# Altium PCB wchlink.PcbDoc
Units mil, origin at the board's own origin, x right, y up, seen from the top; angles counter-clockwise.
Board outline 1929.18 x 748.11 mil, 2 copper layers (Top Layer, Bottom Layer); 27 components, 25 nets, 99 pads, 71 vias.
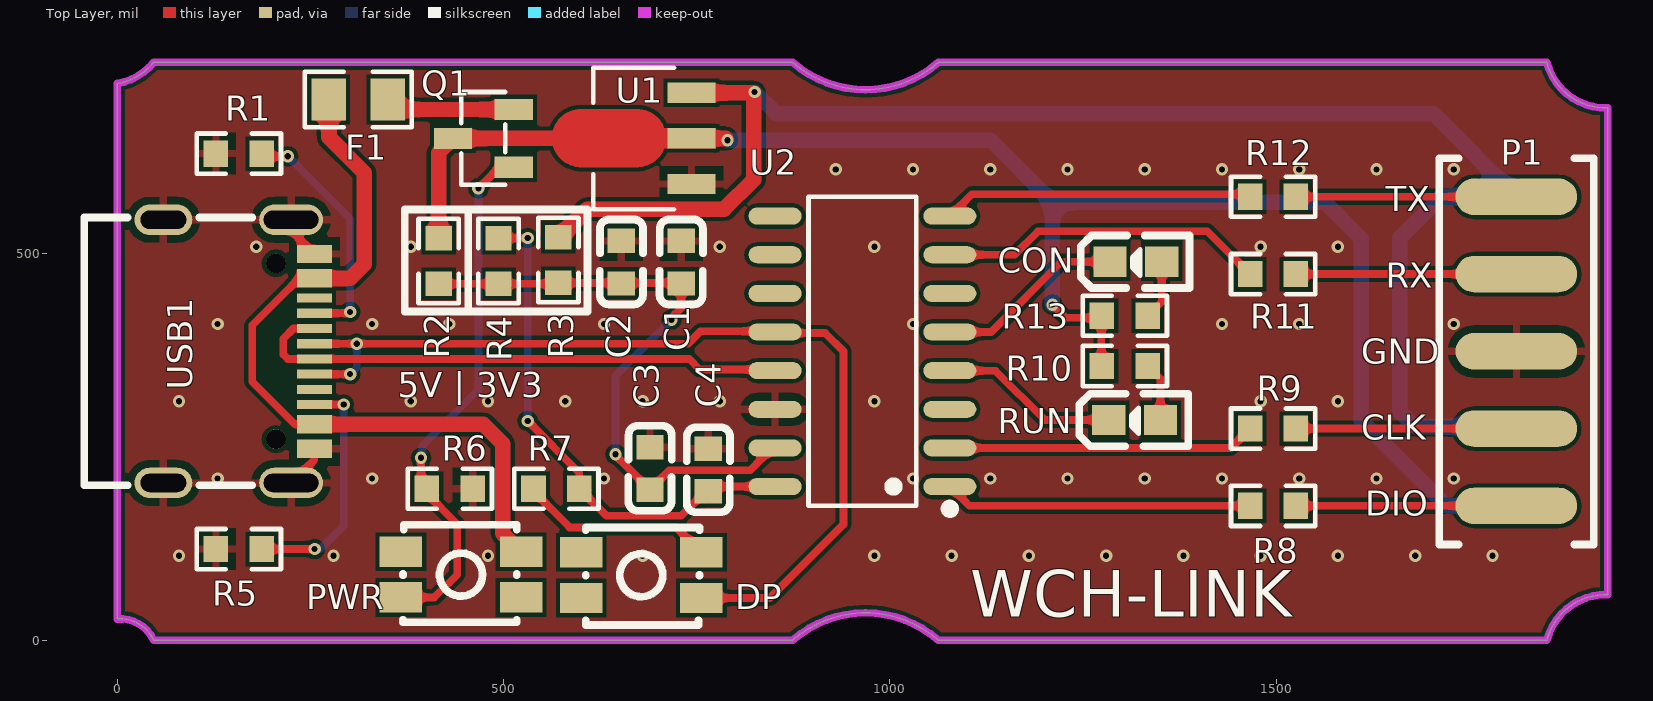
[diagram p0: Top Layer view]
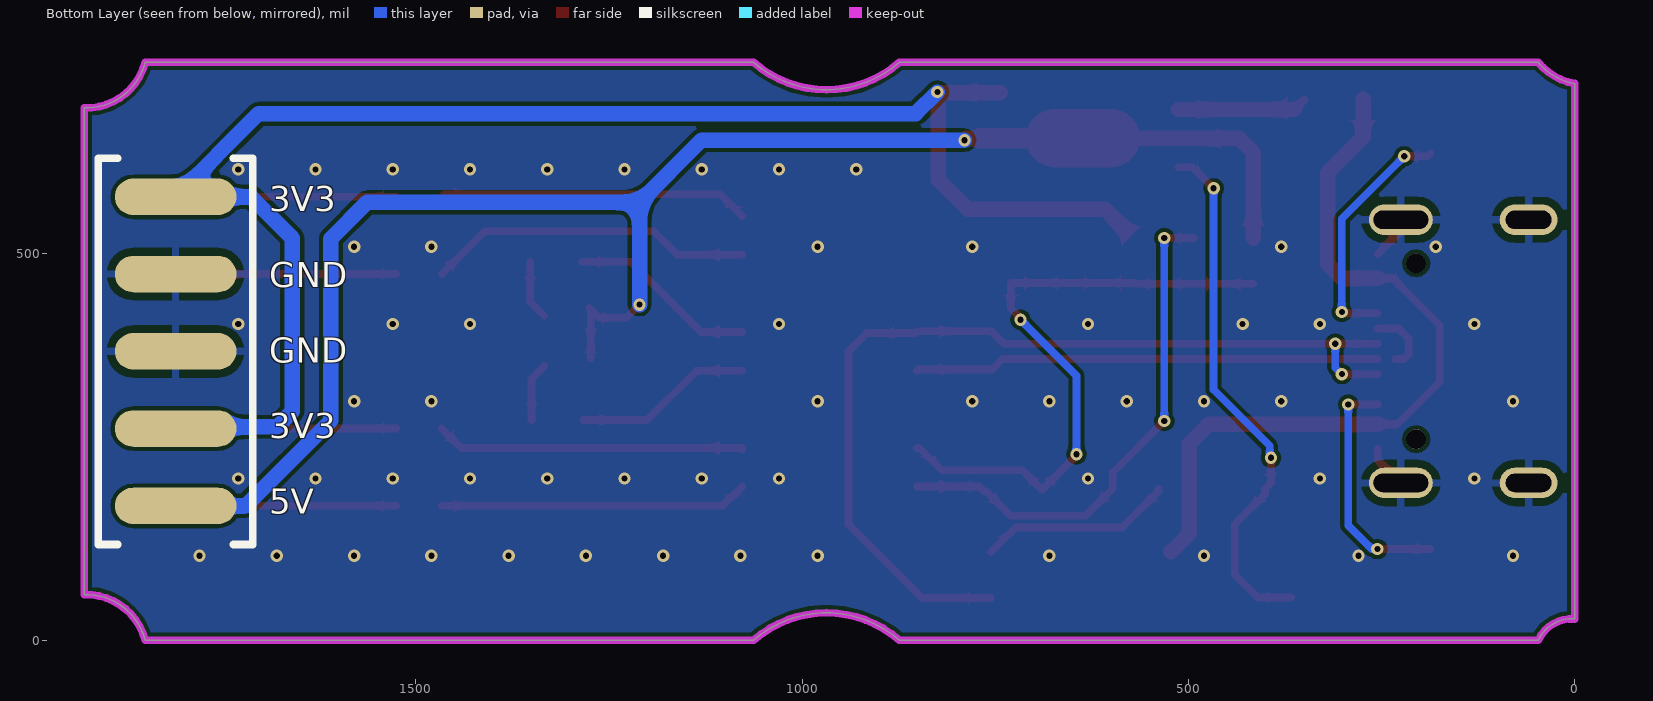
[diagram p1: Bottom Layer view, seen from below]

## Layer stack, top to bottom
Top Solder: solder mask 0.4, Solder Resist, Dk 3.5
Top Layer: signal copper 1.4
Dielectric 1: dielectric 12.6, FR-4, Dk 4.8
Bottom Layer: signal copper 1.4
Bottom Solder: solder mask 0.4, Solder Resist, Dk 3.5

## Board outline
0,27.59 cw(c4.26,-19.44) 47.29,0 874.06,0 cw(c968.55,-107.84) 1063.04,0 1850.43,0 cw(c1926.69,-19.6) 1929.18,59.1 1929.18,689.05 cw(c1926.7,767.75) 1850.45,748.11 1063.06,748.11 cw(c968.57,855.92) 874.08,748.11 874.06,748.11 47.3,748.1 cw(c-13.53,798.09) 0,720.53

## Design rules (kind name [scope] priority, off if disabled: settings)
Clearance [All] p1: gap=5 ignorepadtopadclearanceinfootprint=FALSE except(0: Arc-Hole Track-Hole SMDPad-Hole THPad-Hole Via-Hole Fill-Hole Poly-Hole Region-Hole Text-Hole)
ComponentClearance [All] p1: gap=5 collisioncheckmode=3 verticalgap=5 showdistances=FALSE
PolygonConnect [All] p1: thpad.connectstyle=Relief thpad.reliefconductorwidth=10 thpad.reliefentries=4 thpad.polygonreliefangle="90 Angle" thpad.airgapwidth=10 smdpad.connectstyle=Relief smdpad.reliefconductorwidth=10 smdpad.reliefentries=4 smdpad.polygonreliefangle="90 Angle" smdpad.airgapwidth=10 via.connectstyle=Direct via.reliefconductorwidth=10 via.reliefentries=4 via.polygonreliefangle="90 Angle" via.airgapwidth=10
RoutingVias [All] p1: holewidth=8 width=16 viastyle="Through Hole" minholewidth=6 minwidth=12 maxholewidth=28 maxwidth=50
SolderMaskExpansion [All] p1: expansion=4
Width [All] p1: maxlimit=40 minlimit=6 preferedwidth=6 minimp=50.000000 maximp=50.000000 favimp=50.000000
29 further rules are at their usual default settings.

## Components (designator, comment, footprint, x,y, rotation, side; value= is the part's Value field where it differs from the comment)
C1 "10uF" C0603 730,489.4 r270 top
C2 "100nF" C0603 652.49,489.4 r270 top
C3 "100nF" C0603 689.56,222.4 r270 top
C4 "100nF" C0603 765,220.43 r270 top
CON "LED" LED-0603 1318.5,490 r0 top (schematic designator D2)
DP "TS-1071SA-A3B3-D4" KEY-SMD_4P-L3.5-W3.0-P1.40-LS4.6 678.35,84.26 r180 top (schematic designator SW2)
F1 "0.5A" R0805 311.96,700 r180 top
P1 "HDR_IDC-10PIN" IDC-2X5PIN 1811.02,574.02 r0 top locked
PWR "TS-1071SA-A3B3-D4" KEY-SMD_4P-L3.5-W3.0-P1.40-LS4.6 445,85 r0 top (schematic designator SW1)
Q1 "SI2301DS" SOT-23-3_L2.9-W1.3-P1.90-LS2.4-BR 473.89,649.61 r0 top
R1 "5.1K" R0603 157.48,629.92 r180 top
R2 "0" R0603 416.02,491 r90 top
R3 "0" R0603 571.03,492.21 r90 top
R4 "0" R0603 493.52,491 r90 top
R5 "5.1K" R0603 157.48,118.11 r180 top
R6 "10K" R0603 430.5,196.21 r0 top
R7 "4.7K" R0603 568.48,196.21 r180 top
R8 "270" R0603 1496.06,174.02 r180 top
R9 "270" R0603 1496.06,274.02 r180 top
R10 "1K" R0603 1304.28,355 r180 top
R11 "270" R0603 1496.06,474.02 r180 top
R12 "270" R0603 1496.06,574.02 r180 top
R13 "1K" R0603 1304.28,420 r180 top
RUN "LED" LED-0603 1316.78,285.24 r0 top (schematic designator D1)
U1 "ME6211A33PG-N" SOT-89_L4.5-W2.5-P1.50-LS4.2-BR 690,649.61 r0 top locked
U2 "CH549G" SOP-16_L10.0-W3.9-P1.27-LS6.0-BL 964.57,374.02 r90 top
USB1 "TYPEC-304J-BCP16" USB-C-SMD_TYPEC-304J-BCP16 157.48,374.02 r270 top locked

## Footprints (in the part's own frame and the unit in brackets; to place one, negate y for a bottom-side part, rotate by r counter-clockwise, add the part's x,y. Pads: shape width x height; smd on the part's side, far side on the other; paste and mask are expansions set on the pad)
C0603 [mm]
  rect 0.8x0.9 smd: 1(-0.7,0) 2(0.7,0)
  silkscreen extent -1.41,-0.71 1.39,0.72
IDC-2X5PIN [mm]
  oval 4x1.2 smd: 1(0,0) 3(0,-2.54) 5(0,-5.08) 7(0,-7.62) 9(0,-10.16)
  oval 4x1.2 smd far side: 2(0,0) 4(0,-2.54) 6(0,-5.08) 8(0,-7.62) 10(0,-10.16)
  silkscreen extent -2.54,-11.43 2.54,1.27
KEY-SMD_4P-L3.5-W3.0-P1.40-LS4.6 [mm]
  rect 1.4x1 smd: 1(-1.975,0.75) 2(1.975,0.75) 3(-1.975,-0.75) 4(1.975,-0.75)
  silkscreen extent -1.91,-1.57 1.83,1.64
LED-0603 [mil]
  rect 43x39 smd: 1(33.5,0) 2(-33.5,0)
  silkscreen extent -72,-34 70,34, body extent -32,-16 32,16, height 24
R0603 [mil]
  rect 31.75x34.02 smd: 1(-29.65,0) 2(29.65,0)
  silkscreen extent -55,-26 55,26
R0805 [mil]
  rect 44.59x54.21 smd: 1(-38.04,0) 2(38.04,0)
  silkscreen extent -69,-36 69,36
SOP-16_L10.0-W3.9-P1.27-LS6.0-BL [mm]
  oval 0.56x1.745 smd: 1(-4.445,-2.873) 2(-3.175,-2.873) 3(-1.905,-2.873) 4(-0.635,-2.873) 5(0.635,-2.873) 6(1.905,-2.873) 7(3.175,-2.873) 8(4.445,-2.873) 9(4.445,2.873) 10(3.175,2.873) 11(1.905,2.873) 12(0.635,2.873) 13(-0.635,2.873) 14(-1.905,2.873) 15(-3.175,2.873) 16(-4.445,2.873)
  silkscreen extent -5.33,-3.02 5.08,1.77
SOT-23-3_L2.9-W1.3-P1.90-LS2.4-BR [mm]
  rect 1.25x0.7 smd: 1(1,-0.95) 2(1,0.95) 3(-1,0)
  silkscreen extent -0.73,-1.53 0.73,1.53
SOT-89_L4.5-W2.5-P1.50-LS4.2-BR [mm]
  rect 1.575x0.672 smd: 1(1.356,-1.5) 2(1.356,0) 3(1.356,1.5)
  round 0 smd: 2(-1.356,0.009)
  Top Layer region: -2.283,0.959 -0.429,0.959 -0.385,0.958 -0.34,0.955 -0.296,0.949 -0.252,0.942 -0.208,0.933 -0.165,0.921 -0.123,0.908 -0.081,0.893 -0.04,0.875 0,0.856 0.04,0.835 0.078,0.812 0.115,0.788 0.151,0.761 0.185,0.733 0.219,0.704 0.251,0.673 0.281,0.64 0.31,0.606 0.337,0.571 0.362,0.534 0.386,0.497 0.408,0.458 0.428,0.418 0.447,0.339 2.144,0.339 2.144,-0.321 0.447,-0.321 0.428,-0.401 0.408,-0.44 0.386,-0.479 0.362,-0.517 0.337,-0.553 0.31,-0.588 0.281,-0.622 0.251,-0.655 0.219,-0.686 0.185,-0.716 0.151,-0.744 0.115,-0.77 0.078,-0.795 0.04,-0.818 0,-0.839 -0.04,-0.858 -0.081,-0.875 -0.123,-0.89 -0.165,-0.904 -0.208,-0.915 -0.252,-0.925 -0.296,-0.932 -0.34,-0.937 -0.385,-0.94 -0.429,-0.941 -2.283,-0.941 -2.328,-0.94 -2.372,-0.937 -2.416,-0.932 -2.46,-0.925 -2.504,-0.915 -2.547,-0.904 -2.589,-0.89 -2.631,-0.875 -2.672,-0.858 -2.713,-0.839 -2.752,-0.818 -2.79,-0.795 -2.827,-0.77 -2.863,-0.744 -2.898,-0.716 -2.931,-0.686 -2.963,-0.655 -2.993,-0.622 -3.022,-0.588 -3.049,-0.553 -3.075,-0.517 -3.098,-0.479 -3.12,-0.44 -3.141,-0.401 -3.159,-0.36 -3.175,-0.318 -3.189,-0.276 -3.202,-0.233 -3.212,-0.19 -3.22,-0.146 -3.227,-0.102 -3.231,-0.058 -3.233,-0.013 -3.233,0.031 -3.231,0.076 -3.227,0.12 -3.22,0.164 -3.212,0.208 -3.202,0.251 -3.189,0.294 -3.175,0.336 -3.159,0.377 -3.141,0.418 -3.12,0.458 -3.098,0.497 -3.075,0.534 -3.049,0.571 -3.022,0.606 -2.993,0.64 -2.963,0.673 -2.931,0.704 -2.898,0.733 -2.863,0.761 -2.827,0.788 -2.79,0.812 -2.752,0.835 -2.713,0.856 -2.672,0.875 -2.631,0.893 -2.589,0.908 -2.547,0.921 -2.504,0.933 -2.46,0.942 -2.416,0.949 -2.372,0.955 -2.328,0.958
  silkscreen extent -1.87,-2.33 0.78,2.33
USB-C-SMD_TYPEC-304J-BCP16 [mm]
  oval 1x2.1 hole 0.6 slot 1.8 at 90 deg: 13(-4.325,1.719) 14(4.325,1.719)
  oval 1x1.9 hole 0.6 slot 1.5 at 90 deg: 15(-4.325,-2.481) 16(4.325,-2.481)
  rect 0.6x1.15 smd: A1B12(-3.2,2.481) A4B9(-2.4,2.481) B1A12(3.2,2.481) B4A9(2.4,2.481)
  rect 0.3x1.15 smd: A5(-1.25,2.481) A6(-0.25,2.481) A7(0.25,2.481) A8(1.25,2.481) B5(1.75,2.481) B6(0.75,2.481) B7(-0.75,2.481) B8(-1.75,2.481)
  round 0.65 hole 0.65 unplated: ""(-2.89,1.219) ""(2.89,1.219)
  silkscreen extent -4.4,-5.08 4.4,0.44, body extent -4.37,-5.09 4.57,2.81, height 3.11

## Part data
C1 C2 C3 C4: library part CAP_0603, BOM_Manufacturer=YAGEO, BOM_Manufacturer Part=CC0603GRNPO9BN200, BOM_Supplier=LCSC, BOM_Supplier Part=C325469, Contributor=LCSC, nameAlias=Capacitance, spicePre=C, spiceSymbolName=CC0603GRNPO9BN200
CON RUN: library part LED-Y, BOM_Manufacturer Part=?, nameAlias=Model, spicePre=D, spiceSymbolName=LED
DP PWR: BOM_JLCPCB Part Class="Extended Part", BOM_Manufacturer=Yuandi, BOM_Manufacturer Part=TS-1071SA-A3B3-D4, BOM_Supplier=LCSC, BOM_Supplier Part=C498309, Contributor=LCSC, spicePre=S, spiceSymbolName=TS-1071SA-A3B3-D4
F1: BOM_Manufacturer="Brightking Elec (TAIWAN)", BOM_Manufacturer Part=SMD0805B050TF, BOM_Supplier=LCSC, BOM_Supplier Part=C269104, Contributor=LCSC, spicePre=U, spiceSymbolName=SMD0805B050TF
P1: BOM_Manufacturer=BOOMELE, BOM_Manufacturer Part="IDC Box 2.54mm 2X5P", Package Display=No, BOM_Paste Type=expand, BOM_Supplier=LCSC, BOM_Supplier Part=C5665, image=//image.lceda.cn/szlcsc/C5665.jpg, spicePre=P, spiceSymbolName=HDR-IDC-2.54-2X5P
Q1: BOM_Manufacturer="TECH PUBLIC(̨?", BOM_Manufacturer Part=SI2301DS, BOM_Supplier=LCSC, BOM_Supplier Part=C2841444, Contributor=LCSC, spicePre=Q, spiceSymbolName=SI2301DS
R1 R2 R3 R4 R5 R6 R7 R8 R9 R10 R11 R12 R13: library part RES_0603, BOM_Manufacturer=LIZ, BOM_Manufacturer Part=CR0603JA0301G, BOM_Supplier=LCSC, BOM_Supplier Part=C101323, nameAlias="Resistance (Ohms)", spicePre=R, spiceSymbolName=CR0603JA0301G
U1: BOM_JLCPCB Part Class="Extended Part", BOM_Manufacturer="Nanjing Micro One Elec", BOM_Manufacturer Part=ME6211A33PG-N, BOM_Supplier=LCSC, BOM_Supplier Part=C236673, Contributor=LCSC, spicePre=U, spiceSymbolName=ME6211A33PG-N
U2: BOM_Manufacturer=WCH, BOM_Manufacturer Part=CH549G, BOM_Supplier=LCSC, BOM_Supplier Part=C108958, Contributor=Fangbrbr, spicePre=U, spiceSymbolName=CH549G
USB1: BOM_JLCPCB Part Class="Extended Part", BOM_Manufacturer=XUNPU(Ѷ?, BOM_Manufacturer Part=TYPEC-304J-BCP16, BOM_Supplier=LCSC, BOM_Supplier Part=C2835315, Contributor=LCSC, spicePre=U, spiceSymbolName=TYPEC-304J-BCP16

## Via types
v1: diameter 16, hole 8, Top Layer to Bottom Layer, 71 vias

## Nets (pads, with @x,y where several pads share a name; then routed paths per layer and width w, separated by ;. In a path a pad name is that pad's centre, name@x,y a point inside that pad or via, vN(x,y) a via of type N, cw(c..) or ccw(c..) an arc to the next point about the centre after c; other vN are vias at no path point)
+3V3: P1.2 P1.8 R3.2 U1.3 | length 2071.2
  Top Layer w10: R3.2@582.64,521.86 R3.2@582.64,532.33
  Top Layer w20: R3.2@582.64,532.33 608.33,558.03 785.67,558.03 823.97,596.33 823.97,708.67 U1.3
  Bottom Layer w10: P1.8@1808.8,276.24 P1.8
  Bottom Layer w20: v1(825,709.69) 853.11,681.59 1703.45,681.59 P1.2 1713.36,574.02 1660,520.65 1660,296.24 1680,276.24 P1.8@1808.8,276.24
+5V: P1.10 Q1.3 R2.2 R10.2 R13.2 U1.2 | length 2014.3
  Top Layer w10: 636.26,649.61 636.61,649.95 ; v1@787.72,649.61 v1(790,647.33) ; v1(1210.51,434.49) 1227.67,417.33 1262.84,417.33 R13.2@1273.84,428.33 ; R10.2@1273.84,365 R13.2@1273.84,428.33 ; R13.2@1275.34,429.83 R13.2@1273.84,428.33
  Top Layer w20: R2.2 416.02,631.1 Q1.3 636.26,649.61 ; U1.2@743.4,649.61 v1@787.72,649.61
  Bottom Layer w20: v1(790,647.33) 1130.12,647.33 1210.51,566.94 ; v1(1210.51,434.49) 1210.51,566.94 ; P1.10 1720.48,174.02 1610,284.5 1610,520 1563.06,566.94 1210.51,566.94
+V33: C4.2 R4.2 R7.1 U2.16 | length 673.6
  Top Layer w10: R4.2 v1(531.37,520.65) ; v1(531.37,283.87) 598.14,217.1 R7.1 633.28,161.07 730.17,161.07 761.98,192.87 C4.2 771.14,199.02 U2.16
  Bottom Layer w10: v1(531.37,283.87) v1(531.37,520.65)
CLK: P1.7 R9.1 | length 285.3
  Top Layer w10: R9.1 P1.7
D_SWCLK: R9.2 U2.2 | length 401.1
  Top Layer w10: U2.2@1077.66,247.01 U2.2 1441.41,249.02 R9.2
D_SWDIO: R8.2 U2.1 | length 399.1
  Top Layer w10: U2.1 1102.66,174.02 R8.2
DIO: P1.9 R8.1 | length 285.3
  Top Layer w10: R8.1 P1.9
GND: C1.1 C2.1 C3.1 C4.1 P1.4 P1.5 P1.6 R1.2 R5.2 R6.2 U1.1 U2.14 USB1.13 USB1.14 USB1.15 USB1.16 USB1.A1B12 USB1.B1A12 | length 113.5
  Top Layer w10: USB1.14 255.17,233.77 USB1.B1A12 ; USB1.13 225.14,530.03 USB1.A1B12
  other v1: 80,109.45 280,109.45 480,109.45 680,109.45 980,109.45 1080,109.45 1180,109.45 1280,109.45 1380,109.45 1480,109.45 1580,109.45 1680,109.45 1780,109.45 130,209.45 330,209.45 630,209.45 1030,209.45 1130,209.45 1230,209.45 1330,209.45 1430,209.45 1530,209.45 1630,209.45 1730,209.45 80,309.45 380,309.45 480,309.45 580,309.45 680,309.45 780,309.45 980,309.45 1480,309.45 1580,309.45 130,409.45 330,409.45 430,409.45 630,409.45 1030,409.45 1430,409.45 1530,409.45 1730,409.45 180,509.45 380,509.45 780,509.45 980,509.45 1480,509.45 1580,509.45 930,609.45 1030,609.45 1130,609.45 1230,609.45 1330,609.45 1430,609.45 1530,609.45 1630,609.45 1730,609.45
LED_CON: CON.2 U2.5 | length 245
  Top Layer w10: U2.5 1131.1,399.02 1222.08,490 CON.2
LED_RUN: RUN.2 U2.4 | length 232
  Top Layer w10: U2.4 1136.69,349.02 1200.47,285.24 RUN.2
NetD1_1: R10.1 RUN.1 | length 76.5
  Top Layer w10: R10.1 1350.28,338.65 RUN.1
NetD2_1: CON.1 R13.1 | length 77.5
  Top Layer w10: R13.1 1352,438.07 CON.1
NetF1_1: F1.1 Q1.2 | length 168.6
  Top Layer w10: F1.1 F1.1@362.99,687.01
  Top Layer w20: F1.1@362.99,687.01 Q1.2
NetQ1_1: PWR.3 Q1.1 R6.1 | length 692.1
  Top Layer w10: PWR.3 410.47,55.47 440,85 440,150 400.85,189.15 R6.1 393.24,203.82 v1(393.24,236.22) ; v1(467.52,585) 494.72,612.2 Q1.1
  Bottom Layer w10: v1(393.24,236.22) 395,237.98 395,251.62 467.52,324.14 v1(467.52,585)
NetR1_1: R1.1 USB1.A5 | length 317.1
  Top Layer w10: R1.1 190.62,626.44 v1(220.83,626.44) ; USB1.A5 299.73,423.22 v1(301.51,425)
  Bottom Layer w10: v1(220.83,626.44) 301.51,545.76 v1(301.51,425)
NetR5_1: R5.1 USB1.B5 | length 313.4
  Top Layer w10: R5.1 v1(255.56,118.11) ; USB1.B5 293.09,305.12 v1(293.21,305.24)
  Bottom Layer w10: v1(255.56,118.11) 262.69,118.11 293.21,148.63 v1(293.21,305.24)
NetR7_2: DP.3 R7.2 | length 253.4
  Top Layer w10: R7.2 538.83,192.76 585.52,146.07 723.83,146.07 DP.3
RXD: P1.3 R11.1 | length 285.3
  Top Layer w10: R11.1 P1.3
TXD: P1.1 R12.1 | length 285.3
  Top Layer w10: R12.1 P1.1
UART0_RX: R11.2 U2.7 | length 424.4
  Top Layer w10: U2.7 1161.41,499.02 1191.89,529.5 1410.93,529.5 R11.2
UART0_TX: R12.2 U2.8 | length 401.9
  Top Layer w10: U2.8 1106,577.36 1463.07,577.36 R12.2
USB_+5V: F1.2 PWR.2 USB1.A4B9 USB1.B4A9 | length 990.3
  Top Layer w10: USB1.B4A9 230,279.53 174.85,334.68 174.85,407.76 235.6,468.51 USB1.A4B9
  Top Layer w20: USB1.B4A9 473.96,279.53 498.97,254.52 498.97,138.32 PWR.2 ; USB1.A4B9 301.51,468.51 320,487 320,605 273.92,651.08 F1.2
USB_DN: U2.13 USB1.A7 USB1.B7 | length 688.5
  Top Layer w10: 232.53,364.17 220.83,364.17 215,370 215,390.34 228.2,403.54 USB1.B7 ; USB1.A7 740.31,364.17 754.1,350.39 850.1,350.39 U2.13
USB_DP: DP.1 U2.12 USB1.A6 USB1.B6 | length 1238.9
  Top Layer w10: USB1.B6 v1(301.51,344.49) ; USB1.A6 v1(310,383.86) 738.86,383.86 755,400 850.49,400 U2.12 852.86,397.63 916.38,397.63 940,374.02 940,150 844.73,54.73 DP.1
  Bottom Layer w10: v1(301.51,344.49) 310,352.98 v1(310,383.86)
VDD: C1.2 C2.2 C3.2 R2.1 R3.1 R4.1 U2.15 | length 819.8
  Top Layer w10: R2.1 R4.1 569.83,461.34 R3.1 729.3,462.55 C1.2 730,429.83 717.49,417.33 v1(717.49,415) ; v1(645,240.76) 645,239.4 C3.2 714.71,220 819.4,220 848.42,249.02 U2.15
  Bottom Layer w10: v1(645,240.76) 645,342.5 v1(717.49,415)
pads on no net: DP.2 DP.4 PWR.1 PWR.4 U2.3 U2.6 U2.9 U2.10 U2.11 USB1. USB1.A8 USB1.B8

## Polygon pours and split planes (outlines as drawn)
GND on Top Layer "GND_L01_P000" (solid, remove dead copper, pour order 0): -45,870 -42.52,867.52 -42.52,-215 2130,-215 2135,-210 2130,-205 2130,790 37.42,790 -42.58,870
GND on Bottom Layer "GND_L02_P002" (solid, remove dead copper, pour order 2): -85,910 -65,890 -65,-295 2275,-295 2310,-260 2250,-200 2250,935

## Keep-outs
Keep-Out Layer:
  the board outline again, w10

## Silkscreen, mask and mechanical layers (free items; w line width, h text height)
Top Overlay:
  lines w10: 453.67,425.57 372.32,425.57 372.32,557.53 454.44,557.53 ; 454.26,425.53 608.84,425.53 608.84,557.53 454.26,557.53 454.26,425.53
  text "TX" at 1641.99,555 h32
  text "RX" at 1641.99,456.52 h32
  text "GND" at 1610,358.03 h32
  text "5V | 3V3" at 362.99,314.61 h32
  text "CLK" at 1610,259.55 h32
  text "DIO" at 1615.33,161.07 h32
  text "WCH-LINK" at 1104.33,30.78 h60
Bottom Overlay:
  text "3V3" at 1690,555 h32
  text "GND" at 1690,457.15 h32
  text "GND" at 1690,359.3 h32
  text "3V3" at 1690,261.45 h32
  text "5V" at 1690,163.61 h32
Mechanical 1:
  lines w10: 1850.45,748.11 ccw(c1926.7,767.75) 1929.18,689.05 ; 1850.45,748.11 1063.06,748.11 cw(c968.57,855.92) 874.08,748.11 874.06,748.11 47.3,748.1 cw(c-13.53,798.09) 0,720.53 0,27.59 cw(c4.26,-19.44) 47.29,0 874.06,0 cw(c968.55,-107.84) 1063.04,0 1850.43,0 cw(c1926.69,-19.6) 1929.18,59.1 ; 1850.45,748.11 1850.45,748.11 ; 1929.18,59.1 1929.18,689.05 ; 1929.18,59.1 1929.18,59.1 ; 1929.18,689.05 1929.18,689.05